# EAGLE board ClipBoard-Panelized (EAGLE 9.1.3)
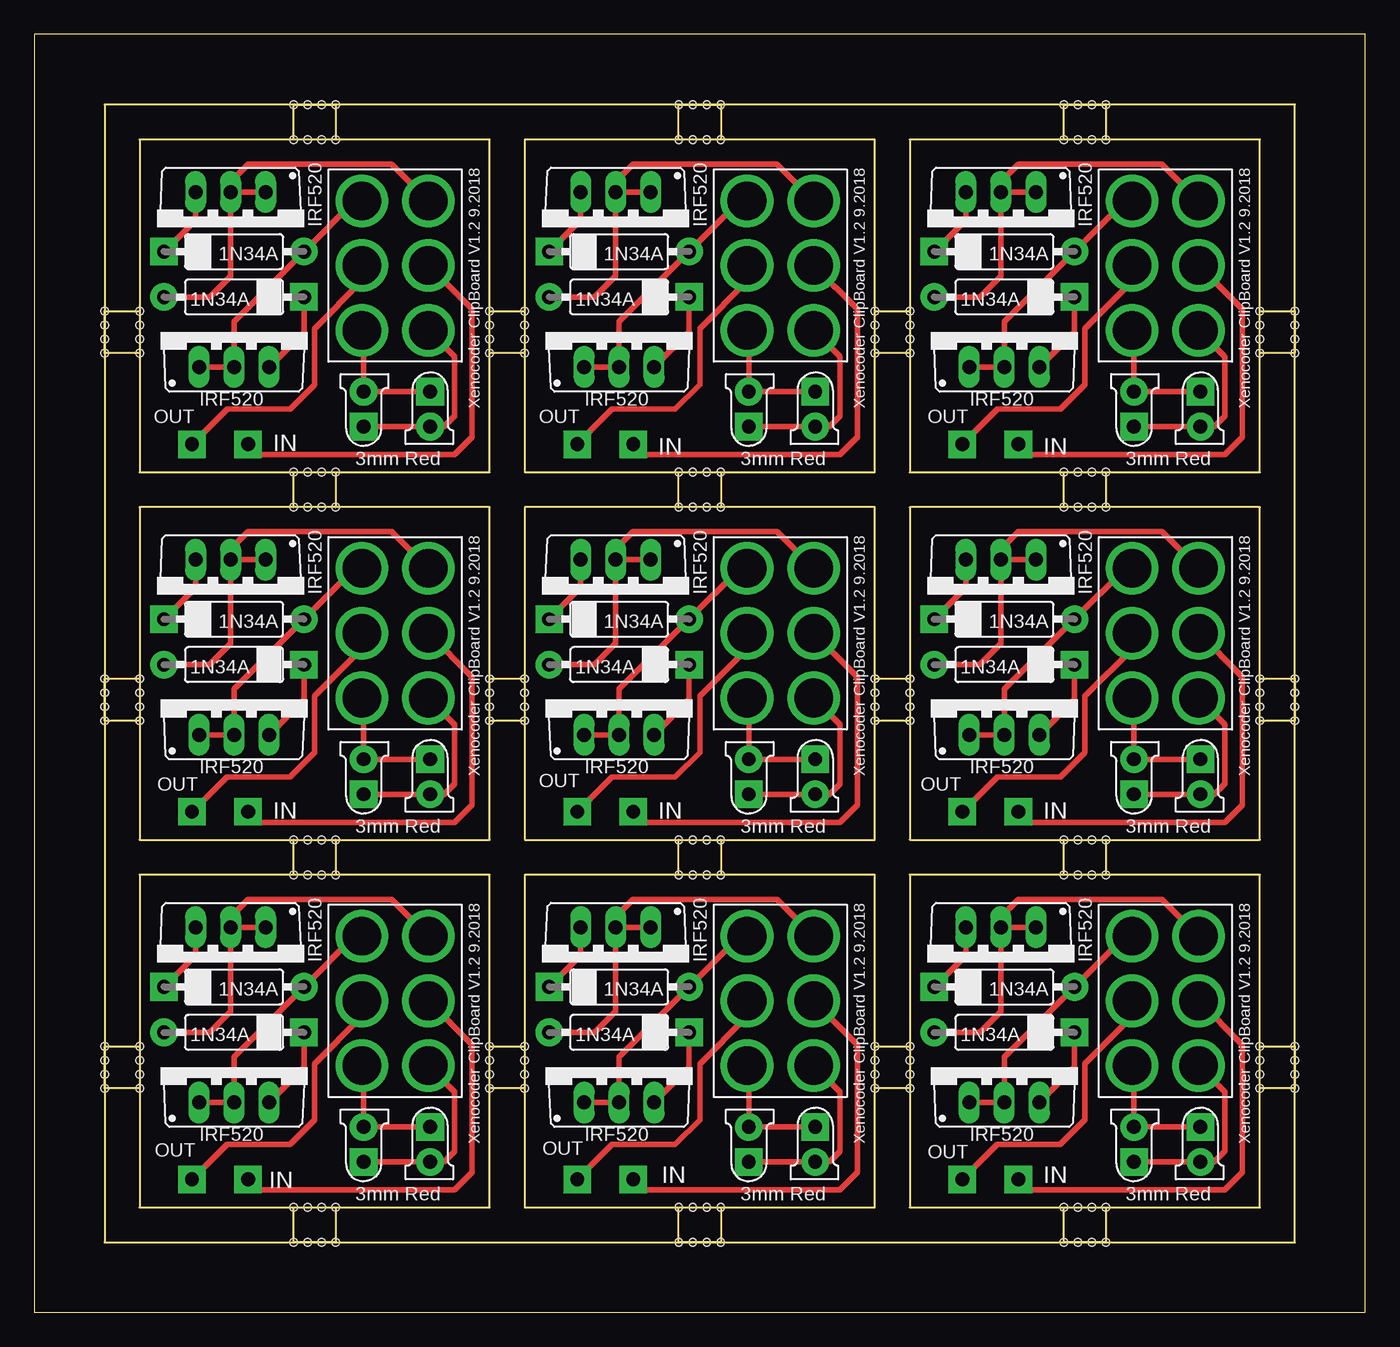
[diagram p0: board, top side]
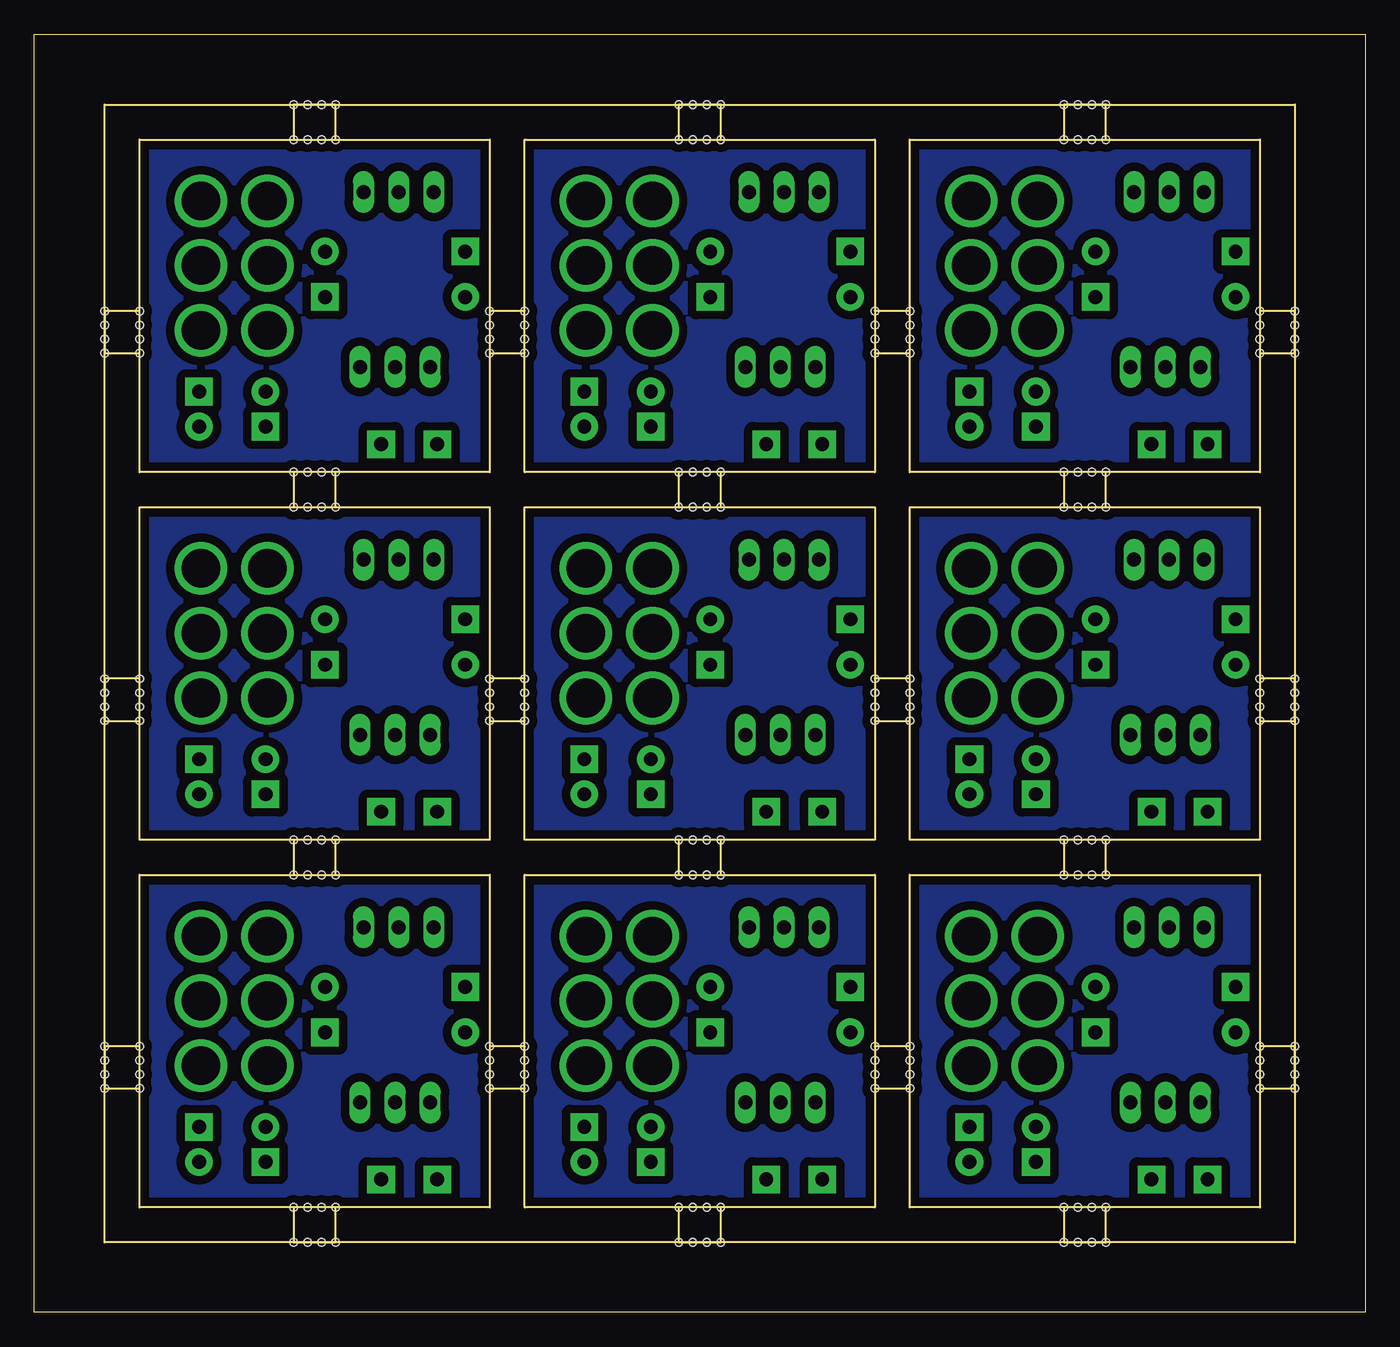
[diagram p1: board, bottom side, seen from below]

Size 96.52 x 92.71 mm. Coordinates in mm from the lower left corner, seen from the top.
Outline: 33.02,16.26 33.02,7.62 7.62,7.62 7.62,31.75 18.8,31.75
Outline: 33.02,16.26 33.02,19.3
Outline: 33.02,19.3 33.02,31.75 21.84,31.75
Outline: 21.84,31.75 18.8,31.75
Outline: 49.78,31.75 60.96,31.75 60.96,7.62 35.56,7.62 35.56,16.26
Outline: 49.78,31.75 46.74,31.75
Outline: 46.74,31.75 35.56,31.75 35.56,19.3
Outline: 35.56,19.3 35.56,16.26
Outline: 77.72,31.75 88.9,31.75 88.9,7.62 63.5,7.62 63.5,31.75 74.68,31.75
Outline: 77.72,31.75 74.68,31.75
Outline: 33.02,19.3 35.56,19.3
Outline: 35.56,19.3 35.56,16.26
Outline: 35.56,16.26 33.02,16.26
Outline: 33.02,16.26 33.02,19.3
Outline: 60.96,16.26 60.96,19.3
Outline: 63.5,19.3 63.5,16.26
Outline: 60.96,19.3 63.5,19.3
Outline: 63.5,19.3 63.5,16.26
Outline: 63.5,16.26 60.96,16.26
Outline: 60.96,16.26 60.96,19.3
Outline: 21.84,31.75 18.8,31.75
Outline: 18.8,34.29 21.84,34.29
Outline: 18.8,31.75 18.8,34.29
Outline: 18.8,34.29 21.84,34.29
Outline: 21.84,34.29 21.84,31.75
Outline: 21.84,31.75 18.8,31.75
Outline: 49.78,31.75 46.74,31.75
Outline: 49.78,31.75 46.74,31.75
Outline: 46.74,34.29 49.78,34.29
Outline: 46.74,31.75 46.74,34.29
Outline: 46.74,34.29 49.78,34.29
Outline: 49.78,34.29 49.78,31.75
Outline: 49.78,31.75 46.74,31.75
Outline: 77.72,31.75 74.68,31.75
Outline: 77.72,31.75 74.68,31.75
Outline: 74.68,34.29 77.72,34.29
Outline: 74.68,31.75 74.68,34.29
Outline: 74.68,34.29 77.72,34.29
Outline: 77.72,34.29 77.72,31.75
Outline: 77.72,31.75 74.68,31.75
Outline: 33.02,42.93 33.02,34.29 7.62,34.29 7.62,58.42 18.8,58.42
Outline: 33.02,42.93 33.02,45.97
Outline: 33.02,45.97 33.02,58.42 21.84,58.42
Outline: 21.84,58.42 18.8,58.42
Outline: 49.78,58.42 60.96,58.42 60.96,34.29 35.56,34.29 35.56,42.93
Outline: 49.78,58.42 46.74,58.42
Outline: 46.74,58.42 35.56,58.42 35.56,45.97
Outline: 35.56,45.97 35.56,42.93
Outline: 77.72,58.42 88.9,58.42 88.9,34.29 63.5,34.29 63.5,58.42 74.68,58.42
Outline: 77.72,58.42 74.68,58.42
Outline: 33.02,45.97 35.56,45.97
Outline: 35.56,45.97 35.56,42.93
Outline: 35.56,42.93 33.02,42.93
Outline: 33.02,42.93 33.02,45.97
Outline: 60.96,42.93 60.96,45.97
Outline: 63.5,45.97 63.5,42.93
Outline: 60.96,45.97 63.5,45.97
Outline: 63.5,45.97 63.5,42.93
Outline: 63.5,42.93 60.96,42.93
Outline: 60.96,42.93 60.96,45.97
Outline: 21.84,58.42 18.8,58.42
Outline: 18.8,60.96 21.84,60.96
Outline: 18.8,58.42 18.8,60.96
Outline: 18.8,60.96 21.84,60.96
Outline: 21.84,60.96 21.84,58.42
Outline: 21.84,58.42 18.8,58.42
Outline: 49.78,58.42 46.74,58.42
Outline: 49.78,58.42 46.74,58.42
Outline: 46.74,60.96 49.78,60.96
Outline: 46.74,58.42 46.74,60.96
Outline: 46.74,60.96 49.78,60.96
Outline: 49.78,60.96 49.78,58.42
Outline: 49.78,58.42 46.74,58.42
Outline: 77.72,58.42 74.68,58.42
Outline: 77.72,58.42 74.68,58.42
Outline: 74.68,60.96 77.72,60.96
Outline: 74.68,58.42 74.68,60.96
Outline: 74.68,60.96 77.72,60.96
Outline: 77.72,60.96 77.72,58.42
Outline: 77.72,58.42 74.68,58.42
Outline: 33.02,69.6 33.02,60.96 7.62,60.96 7.62,85.09 18.8,85.09
Outline: 33.02,69.6 33.02,72.64
Outline: 33.02,72.64 33.02,85.09 21.84,85.09
Outline: 21.84,85.09 18.8,85.09
Outline: 49.78,85.09 60.96,85.09 60.96,60.96 35.56,60.96 35.56,69.6
Outline: 49.78,85.09 46.74,85.09
Outline: 46.74,85.09 35.56,85.09 35.56,72.64
Outline: 35.56,72.64 35.56,69.6
Outline: 77.72,85.09 88.9,85.09 88.9,60.96 63.5,60.96 63.5,85.09 74.68,85.09
Outline: 77.72,85.09 74.68,85.09
Outline: 33.02,72.64 35.56,72.64
Outline: 35.56,72.64 35.56,69.6
Outline: 35.56,69.6 33.02,69.6
Outline: 33.02,69.6 33.02,72.64
Outline: 60.96,69.6 60.96,72.64
Outline: 63.5,72.64 63.5,69.6
Outline: 60.96,72.64 63.5,72.64
Outline: 63.5,72.64 63.5,69.6
Outline: 63.5,69.6 60.96,69.6
Outline: 60.96,69.6 60.96,72.64
Outline: 21.84,85.09 18.8,85.09
Outline: 18.8,87.63 21.84,87.63
Outline: 18.8,85.09 18.8,87.63
Outline: 18.8,87.63 21.84,87.63
Outline: 21.84,87.63 21.84,85.09
Outline: 21.84,85.09 18.8,85.09
Outline: 49.78,85.09 46.74,85.09
Outline: 49.78,85.09 46.74,85.09
Outline: 46.74,87.63 49.78,87.63
Outline: 46.74,85.09 46.74,87.63
Outline: 46.74,87.63 49.78,87.63
Outline: 49.78,87.63 49.78,85.09
Outline: 49.78,85.09 46.74,85.09
Outline: 77.72,85.09 74.68,85.09
Outline: 77.72,85.09 74.68,85.09
Outline: 74.68,87.63 77.72,87.63
Outline: 74.68,85.09 74.68,87.63
Outline: 74.68,87.63 77.72,87.63
Outline: 77.72,87.63 77.72,85.09
Outline: 77.72,85.09 74.68,85.09
Outline: 5.08,16.26 5.08,19.3
Outline: 7.62,19.3 7.62,16.26
Outline: 5.08,19.3 7.62,19.3
Outline: 7.62,19.3 7.62,16.26
Outline: 7.62,16.26 5.08,16.26
Outline: 5.08,16.26 5.08,19.3
Outline: 88.9,16.26 88.9,19.3
Outline: 91.44,19.3 91.44,16.26
Outline: 88.9,19.3 91.44,19.3
Outline: 91.44,19.3 91.44,16.26
Outline: 91.44,16.26 88.9,16.26
Outline: 88.9,16.26 88.9,19.3
Outline: 5.08,42.93 5.08,45.97
Outline: 7.62,45.97 7.62,42.93
Outline: 5.08,45.97 7.62,45.97
Outline: 7.62,45.97 7.62,42.93
Outline: 7.62,42.93 5.08,42.93
Outline: 5.08,42.93 5.08,45.97
Outline: 88.9,42.93 88.9,45.97
Outline: 91.44,45.97 91.44,42.93
Outline: 88.9,45.97 91.44,45.97
Outline: 91.44,45.97 91.44,42.93
Outline: 91.44,42.93 88.9,42.93
Outline: 88.9,42.93 88.9,45.97
Outline: 5.08,69.6 5.08,72.64
Outline: 7.62,72.64 7.62,69.6
Outline: 5.08,72.64 7.62,72.64
Outline: 7.62,72.64 7.62,69.6
Outline: 7.62,69.6 5.08,69.6
Outline: 5.08,69.6 5.08,72.64
Outline: 88.9,69.6 88.9,72.64
Outline: 91.44,72.64 91.44,69.6
Outline: 88.9,72.64 91.44,72.64
Outline: 91.44,72.64 91.44,69.6
Outline: 91.44,69.6 88.9,69.6
Outline: 88.9,69.6 88.9,72.64
Outline: 21.84,5.08 18.8,5.08
Outline: 21.84,5.08 18.8,5.08
Outline: 18.8,7.62 21.84,7.62
Outline: 18.8,5.08 18.8,7.62
Outline: 18.8,7.62 21.84,7.62
Outline: 21.84,7.62 21.84,5.08
Outline: 21.84,5.08 18.8,5.08
Outline: 49.78,5.08 46.74,5.08
Outline: 49.78,5.08 46.74,5.08
Outline: 46.74,7.62 49.78,7.62
Outline: 46.74,5.08 46.74,7.62
Outline: 46.74,7.62 49.78,7.62
Outline: 49.78,7.62 49.78,5.08
Outline: 49.78,5.08 46.74,5.08
Outline: 77.72,5.08 74.68,5.08
Outline: 77.72,5.08 74.68,5.08
Outline: 74.68,7.62 77.72,7.62
Outline: 74.68,5.08 74.68,7.62
Outline: 74.68,7.62 77.72,7.62
Outline: 77.72,7.62 77.72,5.08
Outline: 77.72,5.08 74.68,5.08
Outline: 7.63,7.62 32.69,7.62
Outline: 0,0 96.52,0 96.52,92.71 0,92.71 0,0
Outline: 5.08,5.08 91.44,5.08 91.44,87.63 5.08,87.63 5.08,5.08
Copper layers (1*16): Top 0.035559375mm / dielectric 1.6mm / Bottom 0.035559375mm
Design rules "oshpark-2layer": minimum track width 6mil, minimum drill 10mil, track to track 6mil, track to pad 6mil, pad to pad 6mil, via to via 6mil, smd to smd 6mil, copper to edge 15mil, drill to drill 6mil, minimum pad ring 5mil, minimum via ring 5mil, stop-mask expansion 2.5mil, vias tented up to drill 0mil, thermal gap 10mil
Holes 0.55 mm at 33.02,19.3 33.02,18.29 33.02,17.27 33.02,16.26 35.56,19.3 35.56,18.29 35.56,17.27 35.56,16.26 60.96,19.3 60.96,18.29 60.96,17.27 60.96,16.26 63.5,19.3 63.5,18.29 63.5,17.27 63.5,16.26 18.8,31.75 19.81,31.75 20.83,31.75 21.84,31.75 18.8,34.29 19.81,34.29 20.83,34.29 21.84,34.29 46.74,31.75 47.75,31.75 48.77,31.75 49.78,31.75 46.74,34.29 47.75,34.29 48.77,34.29 49.78,34.29 74.68,31.75 75.69,31.75 76.71,31.75 77.72,31.75 74.68,34.29 75.69,34.29 76.71,34.29 77.72,34.29 33.02,45.97 33.02,44.96 33.02,43.94 33.02,42.93 35.56,45.97 35.56,44.96 35.56,43.94 35.56,42.93 60.96,45.97 60.96,44.96 60.96,43.94 60.96,42.93 63.5,45.97 63.5,44.96 63.5,43.94 63.5,42.93 18.8,58.42 19.81,58.42 20.83,58.42 21.84,58.42 18.8,60.96 19.81,60.96 20.83,60.96 21.84,60.96 46.74,58.42 47.75,58.42 48.77,58.42 49.78,58.42 46.74,60.96 47.75,60.96 48.77,60.96 49.78,60.96 74.68,58.42 75.69,58.42 76.71,58.42 77.72,58.42 74.68,60.96 75.69,60.96 76.71,60.96 77.72,60.96 33.02,72.64 33.02,71.63 33.02,70.61 33.02,69.6 35.56,72.64 35.56,71.63 35.56,70.61 35.56,69.6 60.96,72.64 60.96,71.63 60.96,70.61 60.96,69.6 63.5,72.64 63.5,71.63 63.5,70.61 63.5,69.6 18.8,85.09 19.81,85.09 20.83,85.09 21.84,85.09 18.8,87.63 19.81,87.63 20.83,87.63 21.84,87.63 46.74,85.09 47.75,85.09 48.77,85.09 49.78,85.09 46.74,87.63 47.75,87.63 48.77,87.63 49.78,87.63 74.68,85.09 75.69,85.09 76.71,85.09 77.72,85.09 74.68,87.63 75.69,87.63 76.71,87.63 77.72,87.63 5.08,19.3 5.08,18.29 5.08,17.27 5.08,16.26 7.62,19.3 7.62,18.29 7.62,17.27 7.62,16.26 88.9,19.3 88.9,18.29 88.9,17.27 88.9,16.26 91.44,19.3 91.44,18.29 91.44,17.27 91.44,16.26 5.08,45.97 5.08,44.96 5.08,43.94 5.08,42.93 7.62,45.97 7.62,44.96 7.62,43.94 7.62,42.93 88.9,45.97 88.9,44.96 88.9,43.94 88.9,42.93 91.44,45.97 91.44,44.96 91.44,43.94 91.44,42.93 5.08,72.64 5.08,71.63 5.08,70.61 5.08,69.6 7.62,72.64 7.62,71.63 7.62,70.61 7.62,69.6 88.9,72.64 88.9,71.63 88.9,70.61 88.9,69.6 91.44,72.64 91.44,71.63 91.44,70.61 91.44,69.6 18.8,5.08 19.81,5.08 20.83,5.08 21.84,5.08 18.8,7.62 19.81,7.62 20.83,7.62 21.84,7.62 46.74,5.08 47.75,5.08 48.77,5.08 49.78,5.08 46.74,7.62 47.75,7.62 48.77,7.62 49.78,7.62 74.68,5.08 75.69,5.08 76.71,5.08 77.72,5.08 74.68,7.62 75.69,7.62 76.71,7.62 77.72,7.62

## Footprints (pad centres in the part's own frame; a part is rotated, then mirrored left to right if it is on the bottom)
LED3MM = drill 1 pad 2 square: A -1.27,0 | drill 1 pad 2: K 1.27,0
DO07 = drill 1 pad 2: A 5.08,0 | drill 1 pad 2 square: C -5.08,0
SQUARE = drill 1 pad 2 square: 1 0,0
TO220BV = drill 1.016 long: D 0,-2.54; G -2.54,-2.54; S 2.54,-2.54
DPDT_PCB = drill 2.8 pad 3.81: A1 -2.413,0; A2 -2.413,4.699; A3 -2.413,-4.699; B1 2.413,0; B2 2.413,4.699; B3 2.413,-4.699

## Placement (x,y rotation side)
D1  RED  [LED3MM]  51.82,12.19 90 top
D2  RED  [LED3MM]  56.64,12.19 270 top
D3  RED  [LED3MM]  23.88,12.19 90 top
D4  RED  [LED3MM]  28.7,12.19 270 top
D5  1N34A  [DO07]  14.48,23.62 0 top
D6  1N34A  [DO07]  14.48,20.32 180 top
D7  1N34A  [DO07]  42.42,23.62 0 top
D8  1N34A  [DO07]  42.42,20.32 180 top
D9  RED  [LED3MM]  79.76,12.19 90 top
D10  RED  [LED3MM]  84.58,12.19 270 top
D11  1N34A  [DO07]  70.36,23.62 0 top
D12  1N34A  [DO07]  70.36,20.32 180 top
D13  RED  [LED3MM]  79.76,38.86 90 top
D14  RED  [LED3MM]  84.58,38.86 270 top
D15  1N34A  [DO07]  70.36,50.29 0 top
D16  1N34A  [DO07]  70.36,46.99 180 top
D17  RED  [LED3MM]  51.82,38.86 90 top
D18  RED  [LED3MM]  56.64,38.86 270 top
D19  1N34A  [DO07]  42.42,50.29 0 top
D20  1N34A  [DO07]  42.42,46.99 180 top
D21  RED  [LED3MM]  23.88,38.86 90 top
D22  RED  [LED3MM]  28.7,38.86 270 top
D23  1N34A  [DO07]  14.48,50.29 0 top
D24  1N34A  [DO07]  14.48,46.99 180 top
D25  RED  [LED3MM]  23.88,65.53 90 top
D26  RED  [LED3MM]  28.7,65.53 270 top
D27  1N34A  [DO07]  14.48,76.96 0 top
D28  1N34A  [DO07]  14.48,73.66 180 top
D29  RED  [LED3MM]  51.82,65.53 90 top
D30  RED  [LED3MM]  56.64,65.53 270 top
D31  1N34A  [DO07]  42.42,76.96 0 top
D32  1N34A  [DO07]  42.42,73.66 180 top
D33  RED  [LED3MM]  79.76,65.53 90 top
D34  RED  [LED3MM]  84.58,65.53 270 top
D35  1N34A  [DO07]  70.36,76.96 0 top
D36  1N34A  [DO07]  70.36,73.66 180 top
IN  CLIPIN  [SQUARE]  15.49,9.65 90 top
IN1  CLIPIN  [SQUARE]  43.43,9.65 90 top
IN2  CLIPIN  [SQUARE]  71.37,9.65 90 top
IN3  CLIPIN  [SQUARE]  71.37,36.32 90 top
IN4  CLIPIN  [SQUARE]  43.43,36.32 90 top
IN5  CLIPIN  [SQUARE]  15.49,36.32 90 top
IN6  CLIPIN  [SQUARE]  15.49,62.99 90 top
IN7  CLIPIN  [SQUARE]  43.43,62.99 90 top
IN8  CLIPIN  [SQUARE]  71.37,62.99 90 top
OUT  CLIPOUT  [SQUARE]  11.43,9.65 90 top
OUT1  CLIPOUT  [SQUARE]  39.37,9.65 90 top
OUT2  CLIPOUT  [SQUARE]  67.31,9.65 90 top
OUT3  CLIPOUT  [SQUARE]  67.31,36.32 90 top
OUT4  CLIPOUT  [SQUARE]  39.37,36.32 90 top
OUT5  CLIPOUT  [SQUARE]  11.43,36.32 90 top
OUT6  CLIPOUT  [SQUARE]  11.43,62.99 90 top
OUT7  CLIPOUT  [SQUARE]  39.37,62.99 90 top
OUT8  CLIPOUT  [SQUARE]  67.31,62.99 90 top
Q1  IRF520  [TO220BV]  14.22,25.4 180 top
Q2  IRF520  [TO220BV]  14.48,17.78 0 top
Q3  IRF520  [TO220BV]  42.16,25.4 180 top
Q4  IRF520  [TO220BV]  42.42,17.78 0 top
Q5  IRF520  [TO220BV]  70.1,25.4 180 top
Q6  IRF520  [TO220BV]  70.36,17.78 0 top
Q7  IRF520  [TO220BV]  70.1,52.07 180 top
Q8  IRF520  [TO220BV]  70.36,44.45 0 top
Q9  IRF520  [TO220BV]  42.16,52.07 180 top
Q10  IRF520  [TO220BV]  42.42,44.45 0 top
Q11  IRF520  [TO220BV]  14.22,52.07 180 top
Q12  IRF520  [TO220BV]  14.48,44.45 0 top
Q13  IRF520  [TO220BV]  14.22,78.74 180 top
Q14  IRF520  [TO220BV]  14.48,71.12 0 top
Q15  IRF520  [TO220BV]  42.16,78.74 180 top
Q16  IRF520  [TO220BV]  42.42,71.12 0 top
Q17  IRF520  [TO220BV]  70.1,78.74 180 top
Q18  IRF520  [TO220BV]  70.36,71.12 0 top
SW1  DPDT  [DPDT_PCB]  26.16,22.61 180 top
SW2  DPDT  [DPDT_PCB]  54.1,22.61 180 top
SW3  DPDT  [DPDT_PCB]  82.04,22.61 180 top
SW4  DPDT  [DPDT_PCB]  82.04,49.28 180 top
SW5  DPDT  [DPDT_PCB]  54.1,49.28 180 top
SW6  DPDT  [DPDT_PCB]  26.16,49.28 180 top
SW7  DPDT  [DPDT_PCB]  26.16,75.95 180 top
SW8  DPDT  [DPDT_PCB]  54.1,75.95 180 top
SW9  DPDT  [DPDT_PCB]  82.04,75.95 180 top

## Library data of the parts
D1-D36 = mb_diodes
IN IN1-IN8 OUT OUT1-OUT8 = mb_supply
Q1-Q18 = transistor-power
SW1-SW9 = mb_switches

## Nets
N$1: D3.K D4.A SW1.B2
N$2: D5.C Q1.S
N$3: OUT.1 SW1.B1
N$4: D6.C Q2.S
N$5: D6.A Q1.D Q1.G SW1.A3
N$6: IN.1 SW1.A1
N$7: D3.A D4.K SW1.A2
N$8: D5.A Q2.D Q2.G SW1.B3
N$9: D7.C Q3.S
N$10: D8.C Q4.S
N$11: D8.A Q3.D Q3.G SW2.A3
N$12: D1.A D2.K SW2.A2
N$13: D7.A Q4.D Q4.G SW2.B3
N$14: D1.K D2.A SW2.B2
N$15: IN1.1 SW2.A1
N$16: OUT1.1 SW2.B1
N$17: D11.C Q5.S
N$18: D12.C Q6.S
N$19: D12.A Q5.D Q5.G SW3.A3
N$20: D9.A D10.K SW3.A2
N$21: D11.A Q6.D Q6.G SW3.B3
N$22: D9.K D10.A SW3.B2
N$23: IN2.1 SW3.A1
N$24: OUT2.1 SW3.B1
N$25: D15.C Q7.S
N$26: D16.C Q8.S
N$27: D16.A Q7.D Q7.G SW4.A3
N$28: D13.A D14.K SW4.A2
N$29: D15.A Q8.D Q8.G SW4.B3
N$30: D13.K D14.A SW4.B2
N$31: IN3.1 SW4.A1
N$32: OUT3.1 SW4.B1
N$33: D19.C Q9.S
N$34: D20.C Q10.S
N$35: D20.A Q9.D Q9.G SW5.A3
N$36: D17.A D18.K SW5.A2
N$37: D19.A Q10.D Q10.G SW5.B3
N$38: D17.K D18.A SW5.B2
N$39: IN4.1 SW5.A1
N$40: OUT4.1 SW5.B1
N$41: D23.C Q11.S
N$42: D24.C Q12.S
N$43: D24.A Q11.D Q11.G SW6.A3
N$44: D21.A D22.K SW6.A2
N$45: D23.A Q12.D Q12.G SW6.B3
N$46: D21.K D22.A SW6.B2
N$47: IN5.1 SW6.A1
N$48: OUT5.1 SW6.B1
N$49: D27.C Q13.S
N$50: D28.C Q14.S
N$51: D28.A Q13.D Q13.G SW7.A3
N$52: D25.A D26.K SW7.A2
N$53: D27.A Q14.D Q14.G SW7.B3
N$54: D25.K D26.A SW7.B2
N$55: IN6.1 SW7.A1
N$56: OUT6.1 SW7.B1
N$57: D31.C Q15.S
N$58: D32.C Q16.S
N$59: D32.A Q15.D Q15.G SW8.A3
N$60: D29.A D30.K SW8.A2
N$61: D31.A Q16.D Q16.G SW8.B3
N$62: D29.K D30.A SW8.B2
N$63: IN7.1 SW8.A1
N$64: OUT7.1 SW8.B1
N$65: D35.C Q17.S
N$66: D36.C Q18.S
N$67: D36.A Q17.D Q17.G SW9.A3
N$68: D33.A D34.K SW9.A2
N$69: D35.A Q18.D Q18.G SW9.B3
N$70: D33.K D34.A SW9.B2
N$71: IN8.1 SW9.A1
N$72: OUT8.1 SW9.B1

## Tracks (layer width: path | path; a pad name or v marks a point on that pad's centre or on a via)
GND
  pour Bottom (isolate 0.61): 7.62,7.62 7.62,31.11 32.69,31.11 32.69,7.62
GND1
  pour Bottom (isolate 0.61): 35.56,7.62 35.56,31.11 60.63,31.11 60.63,7.62
GND2
  pour Bottom (isolate 0.61): 63.5,7.62 63.5,31.11 88.57,31.11 88.57,7.62
GND3
  pour Bottom (isolate 0.61): 63.5,34.29 63.5,57.77 88.57,57.77 88.57,34.29
GND4
  pour Bottom (isolate 0.61): 35.56,34.29 35.56,57.77 60.63,57.77 60.63,34.29
GND5
  pour Bottom (isolate 0.61): 7.62,34.29 7.62,57.77 32.69,57.77 32.69,34.29
GND6
  pour Bottom (isolate 0.61): 7.62,60.96 7.62,84.44 32.69,84.44 32.69,60.96
GND7
  pour Bottom (isolate 0.61): 35.56,60.96 35.56,84.44 60.63,84.44 60.63,60.96
GND8
  pour Bottom (isolate 0.61): 63.5,60.96 63.5,84.44 88.57,84.44 88.57,60.96
N$1
  Top 0.406: D4.A D3.K 23.88,17.78 SW1.B2
N$2
  Top 0.406: D5.C 11.68,25.91 Q1.S
N$3
  Top 0.406: SW1.B1 23.75,21.46 20.32,18.03 20.32,13.97 18.54,12.19 13.97,12.19 OUT.1
N$4
  Top 0.406: Q2.S 19.56,17.78 D6.C
N$5
  Top 0.406: Q1.D 14.22,28.7 15.49,29.97 25.91,29.97 SW1.A3 | D6.A 12.7,20.32 14.22,21.84 Q1.D | Q1.G Q1.D
N$6
  Top 0.406: IN.1 16.26,8.89 30.48,8.89 31.75,10.16 31.75,19.43 SW1.A1
N$7
  Top 0.406: D3.A 28.45,10.92 | 28.45,10.92 D4.K | SW1.A2 30.48,16 30.48,11.68 29.72,10.92 28.45,10.92
N$8
  Top 0.406: SW1.B3 23.24,27.3 D5.A 14.48,18.54 Q2.D Q2.G
N$9
  Top 0.406: D7.C 39.62,25.91 Q3.S
N$10
  Top 0.406: Q4.S 47.5,17.78 D8.C
N$11
  Top 0.406: Q3.D 42.16,28.7 43.43,29.97 53.85,29.97 SW2.A3 | D8.A 40.64,20.32 42.16,21.84 Q3.D | Q3.G Q3.D
N$12
  Top 0.406: D1.A 56.39,10.92 | 56.39,10.92 D2.K | SW2.A2 58.42,16 58.42,11.68 57.66,10.92 56.39,10.92
N$13
  Top 0.406: SW2.B3 51.18,27.3 D7.A 42.42,18.54 Q4.D Q4.G
N$14
  Top 0.406: D2.A D1.K 51.82,17.78 SW2.B2
N$15
  Top 0.406: IN1.1 44.2,8.89 58.42,8.89 59.69,10.16 59.69,19.43 SW2.A1
N$16
  Top 0.406: SW2.B1 51.69,21.46 48.26,18.03 48.26,13.97 46.48,12.19 41.91,12.19 OUT1.1
N$17
  Top 0.406: D11.C 67.56,25.91 Q5.S
N$18
  Top 0.406: Q6.S 75.44,17.78 D12.C
N$19
  Top 0.406: Q5.D 70.1,28.7 71.37,29.97 81.79,29.97 SW3.A3 | D12.A 68.58,20.32 70.1,21.84 Q5.D | Q5.G Q5.D
N$20
  Top 0.406: D9.A 84.33,10.92 | 84.33,10.92 D10.K | SW3.A2 86.36,16 86.36,11.68 85.6,10.92 84.33,10.92
N$21
  Top 0.406: SW3.B3 79.12,27.3 D11.A 70.36,18.54 Q6.D Q6.G
N$22
  Top 0.406: D10.A D9.K 79.76,17.78 SW3.B2
N$23
  Top 0.406: IN2.1 72.14,8.89 86.36,8.89 87.63,10.16 87.63,19.43 SW3.A1
N$24
  Top 0.406: SW3.B1 79.63,21.46 76.2,18.03 76.2,13.97 74.42,12.19 69.85,12.19 OUT2.1
N$25
  Top 0.406: D15.C 67.56,52.58 Q7.S
N$26
  Top 0.406: Q8.S 75.44,44.45 D16.C
N$27
  Top 0.406: Q7.D 70.1,55.37 71.37,56.64 81.79,56.64 SW4.A3 | D16.A 68.58,46.99 70.1,48.51 Q7.D | Q7.G Q7.D
N$28
  Top 0.406: D13.A 84.33,37.59 | 84.33,37.59 D14.K | SW4.A2 86.36,42.67 86.36,38.35 85.6,37.59 84.33,37.59
N$29
  Top 0.406: SW4.B3 79.12,53.98 D15.A 70.36,45.21 Q8.D Q8.G
N$30
  Top 0.406: D14.A D13.K 79.76,44.45 SW4.B2
N$31
  Top 0.406: IN3.1 72.14,35.56 86.36,35.56 87.63,36.83 87.63,46.1 SW4.A1
N$32
  Top 0.406: SW4.B1 79.63,48.13 76.2,44.7 76.2,40.64 74.42,38.86 69.85,38.86 OUT3.1
N$33
  Top 0.406: D19.C 39.62,52.58 Q9.S
N$34
  Top 0.406: Q10.S 47.5,44.45 D20.C
N$35
  Top 0.406: Q9.D 42.16,55.37 43.43,56.64 53.85,56.64 SW5.A3 | D20.A 40.64,46.99 42.16,48.51 Q9.D | Q9.G Q9.D
N$36
  Top 0.406: D17.A 56.39,37.59 | 56.39,37.59 D18.K | SW5.A2 58.42,42.67 58.42,38.35 57.66,37.59 56.39,37.59
N$37
  Top 0.406: SW5.B3 51.18,53.98 D19.A 42.42,45.21 Q10.D Q10.G
N$38
  Top 0.406: D18.A D17.K 51.82,44.45 SW5.B2
N$39
  Top 0.406: IN4.1 44.2,35.56 58.42,35.56 59.69,36.83 59.69,46.1 SW5.A1
N$40
  Top 0.406: SW5.B1 51.69,48.13 48.26,44.7 48.26,40.64 46.48,38.86 41.91,38.86 OUT4.1
N$41
  Top 0.406: D23.C 11.68,52.58 Q11.S
N$42
  Top 0.406: Q12.S 19.56,44.45 D24.C
N$43
  Top 0.406: Q11.D 14.22,55.37 15.49,56.64 25.91,56.64 SW6.A3 | D24.A 12.7,46.99 14.22,48.51 Q11.D | Q11.G Q11.D
N$44
  Top 0.406: D21.A 28.45,37.59 | 28.45,37.59 D22.K | SW6.A2 30.48,42.67 30.48,38.35 29.72,37.59 28.45,37.59
N$45
  Top 0.406: SW6.B3 23.24,53.98 D23.A 14.48,45.21 Q12.D Q12.G
N$46
  Top 0.406: D22.A D21.K 23.88,44.45 SW6.B2
N$47
  Top 0.406: IN5.1 16.26,35.56 30.48,35.56 31.75,36.83 31.75,46.1 SW6.A1
N$48
  Top 0.406: SW6.B1 23.75,48.13 20.32,44.7 20.32,40.64 18.54,38.86 13.97,38.86 OUT5.1
N$49
  Top 0.406: D27.C 11.68,79.25 Q13.S
N$50
  Top 0.406: Q14.S 19.56,71.12 D28.C
N$51
  Top 0.406: Q13.D 14.22,82.04 15.49,83.31 25.91,83.31 SW7.A3 | D28.A 12.7,73.66 14.22,75.18 Q13.D | Q13.G Q13.D
N$52
  Top 0.406: D25.A 28.45,64.26 | 28.45,64.26 D26.K | SW7.A2 30.48,69.34 30.48,65.02 29.72,64.26 28.45,64.26
N$53
  Top 0.406: SW7.B3 23.24,80.64 D27.A 14.48,71.88 Q14.D Q14.G
N$54
  Top 0.406: D26.A D25.K 23.88,71.12 SW7.B2
N$55
  Top 0.406: IN6.1 16.26,62.23 30.48,62.23 31.75,63.5 31.75,72.77 SW7.A1
N$56
  Top 0.406: SW7.B1 23.75,74.8 20.32,71.37 20.32,67.31 18.54,65.53 13.97,65.53 OUT6.1
N$57
  Top 0.406: D31.C 39.62,79.25 Q15.S
N$58
  Top 0.406: Q16.S 47.5,71.12 D32.C
N$59
  Top 0.406: Q15.D 42.16,82.04 43.43,83.31 53.85,83.31 SW8.A3 | D32.A 40.64,73.66 42.16,75.18 Q15.D | Q15.G Q15.D
N$60
  Top 0.406: D29.A 56.39,64.26 | 56.39,64.26 D30.K | SW8.A2 58.42,69.34 58.42,65.02 57.66,64.26 56.39,64.26
N$61
  Top 0.406: SW8.B3 51.18,80.64 D31.A 42.42,71.88 Q16.D Q16.G
N$62
  Top 0.406: D30.A D29.K 51.82,71.12 SW8.B2
N$63
  Top 0.406: IN7.1 44.2,62.23 58.42,62.23 59.69,63.5 59.69,72.77 SW8.A1
N$64
  Top 0.406: SW8.B1 51.69,74.8 48.26,71.37 48.26,67.31 46.48,65.53 41.91,65.53 OUT7.1
N$65
  Top 0.406: D35.C 67.56,79.25 Q17.S
N$66
  Top 0.406: Q18.S 75.44,71.12 D36.C
N$67
  Top 0.406: Q17.D 70.1,82.04 71.37,83.31 81.79,83.31 SW9.A3 | D36.A 68.58,73.66 70.1,75.18 Q17.D | Q17.G Q17.D
N$68
  Top 0.406: D33.A 84.33,64.26 | 84.33,64.26 D34.K | SW9.A2 86.36,69.34 86.36,65.02 85.6,64.26 84.33,64.26
N$69
  Top 0.406: SW9.B3 79.12,80.64 D35.A 70.36,71.88 Q18.D Q18.G
N$70
  Top 0.406: D34.A D33.K 79.76,71.12 SW9.B2
N$71
  Top 0.406: IN8.1 72.14,62.23 86.36,62.23 87.63,63.5 87.63,72.77 SW9.A1
N$72
  Top 0.406: SW9.B1 79.63,74.8 76.2,71.37 76.2,67.31 74.42,65.53 69.85,65.53 OUT8.1

## Text on the board
tNames: Xenocoder ClipBoard V1.2 9.2018 | Xenocoder ClipBoard V1.2 9.2018 | Xenocoder ClipBoard V1.2 9.2018 | OUT | OUT | OUT | IN | 3mm Red | IN | 3mm Red | IN | 3mm Red | Xenocoder ClipBoard V1.2 9.2018 | Xenocoder ClipBoard V1.2 9.2018 | Xenocoder ClipBoard V1.2 9.2018 | OUT | OUT | OUT | IN | 3mm Red | IN | 3mm Red | IN | 3mm Red | Xenocoder ClipBoard V1.2 9.2018 | Xenocoder ClipBoard V1.2 9.2018 | Xenocoder ClipBoard V1.2 9.2018 | OUT | OUT | 3mm Red | IN | 3mm Red | IN | 3mm Red